# Altium PCB PCB1.PcbDoc
Units mm, origin at the board's own origin, x right, y up, seen from the top; angles counter-clockwise.
Board outline 45 x 45 mm, 2 copper layers (Top Layer, Bottom Layer); 38 components, 25 nets, 183 pads, 52 vias.
Unrouted connection lines stored in the file: 40.
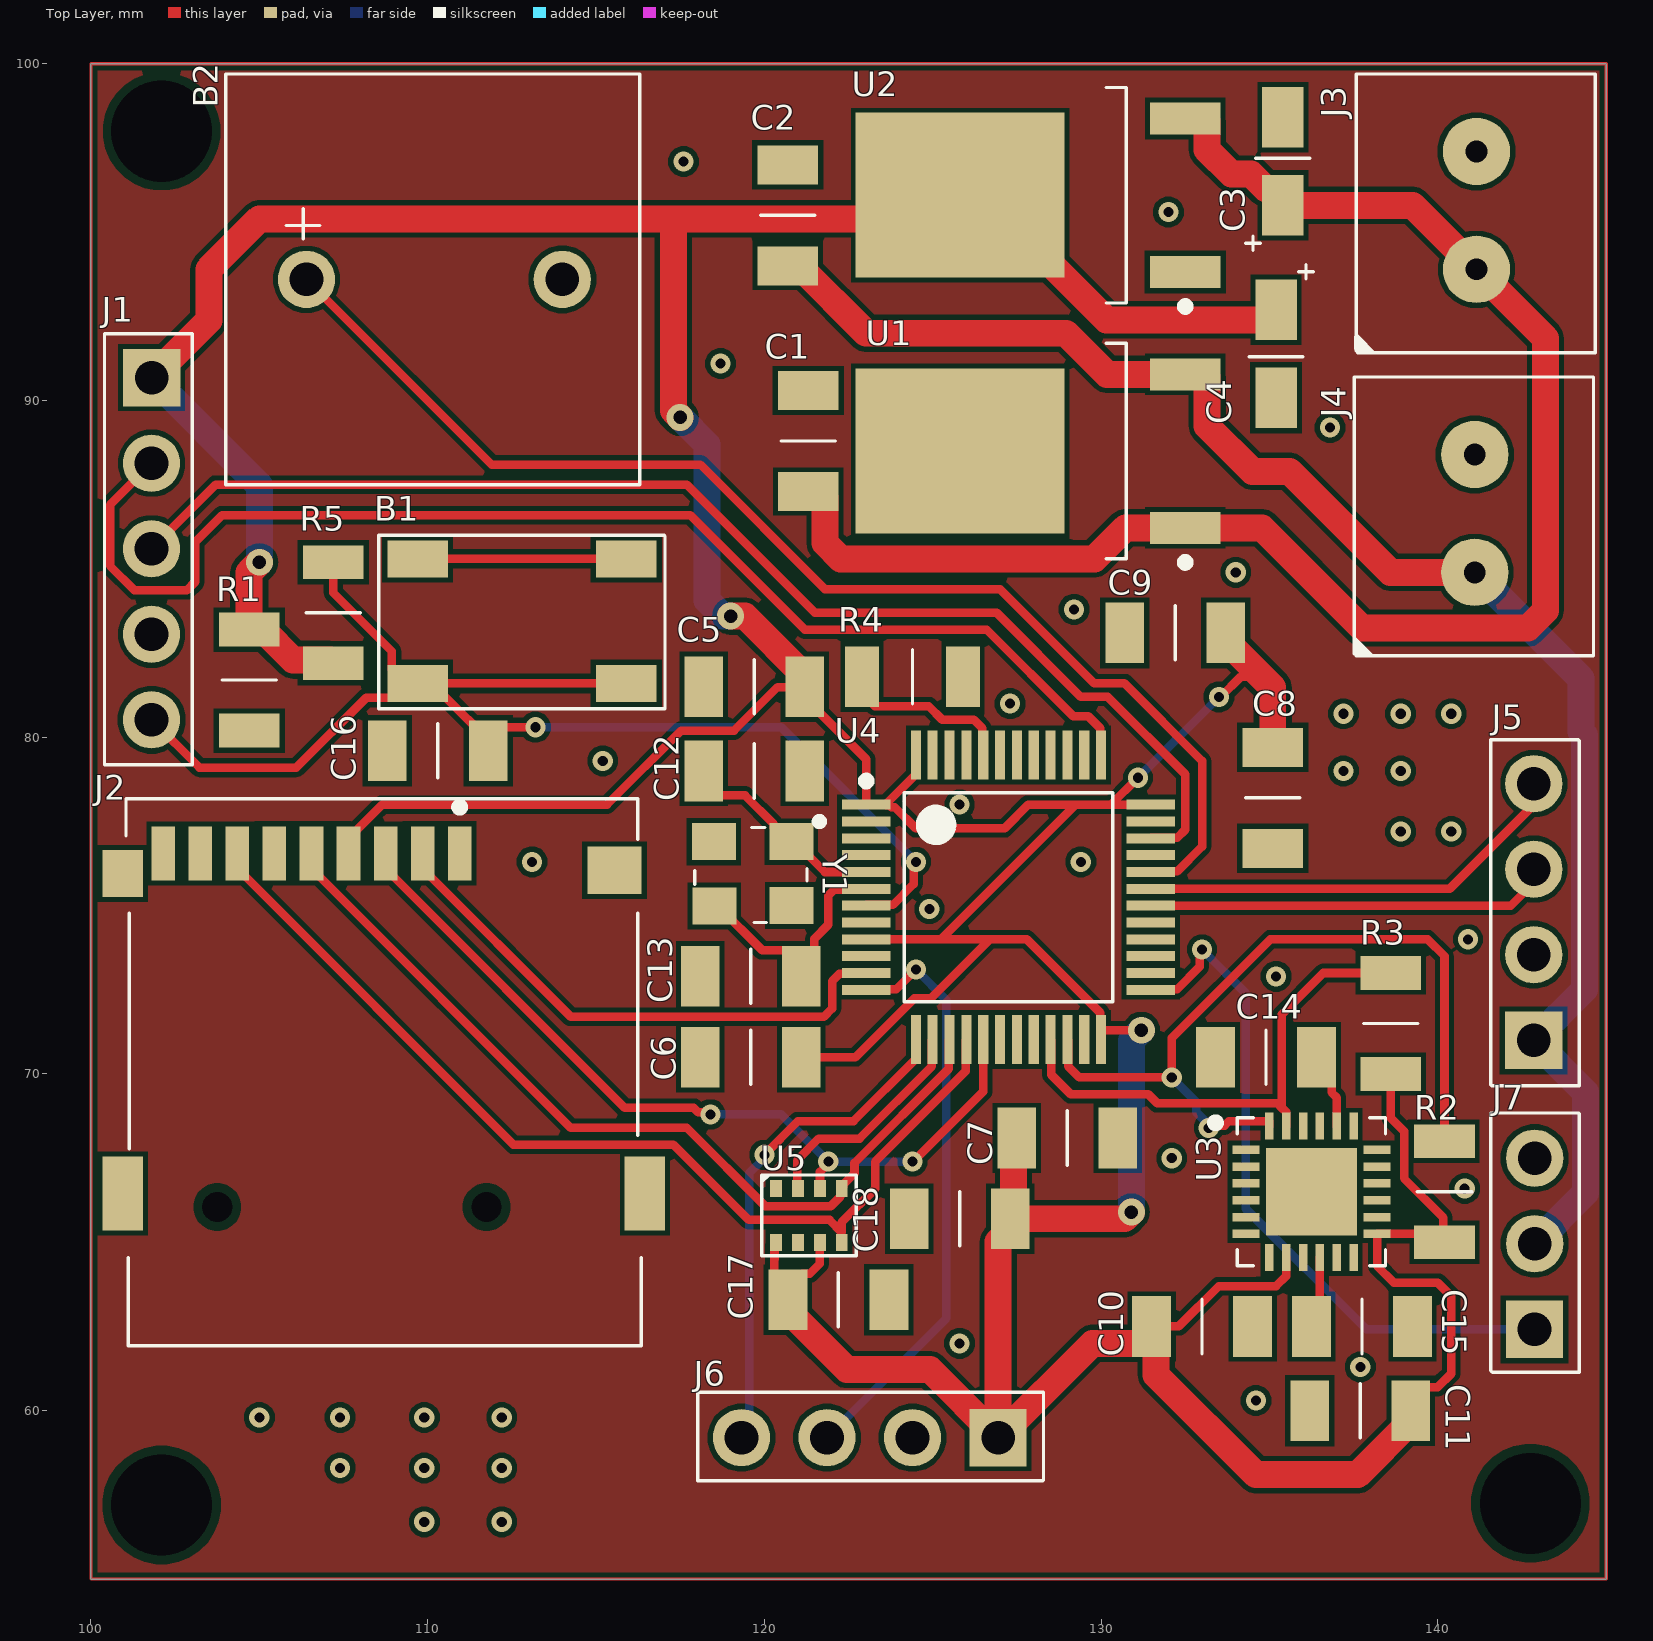
[diagram p0: Top Layer view]
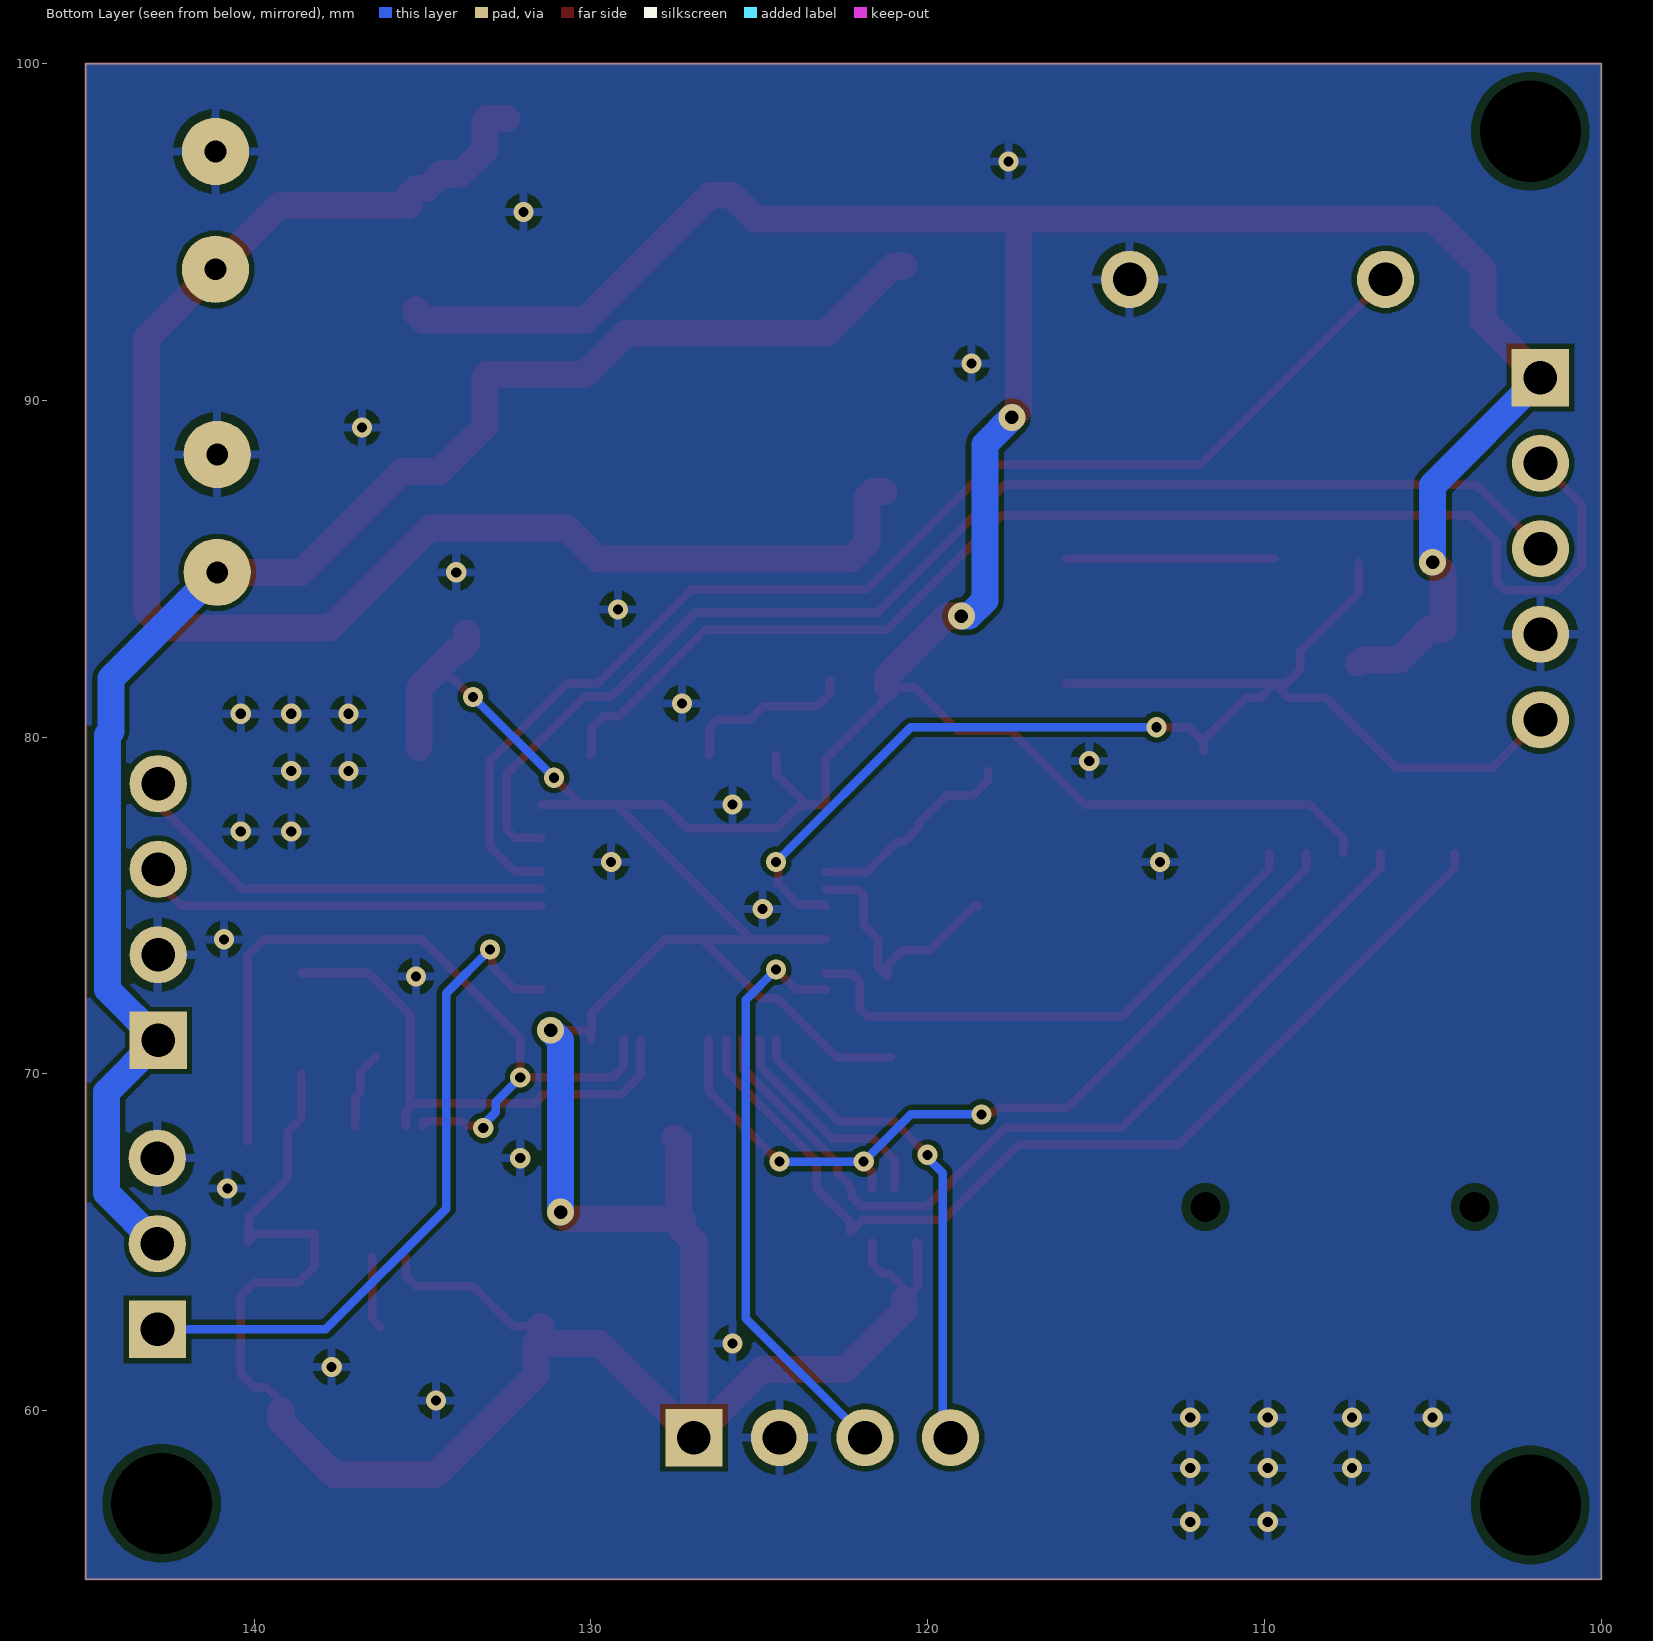
[diagram p1: Bottom Layer view, seen from below]
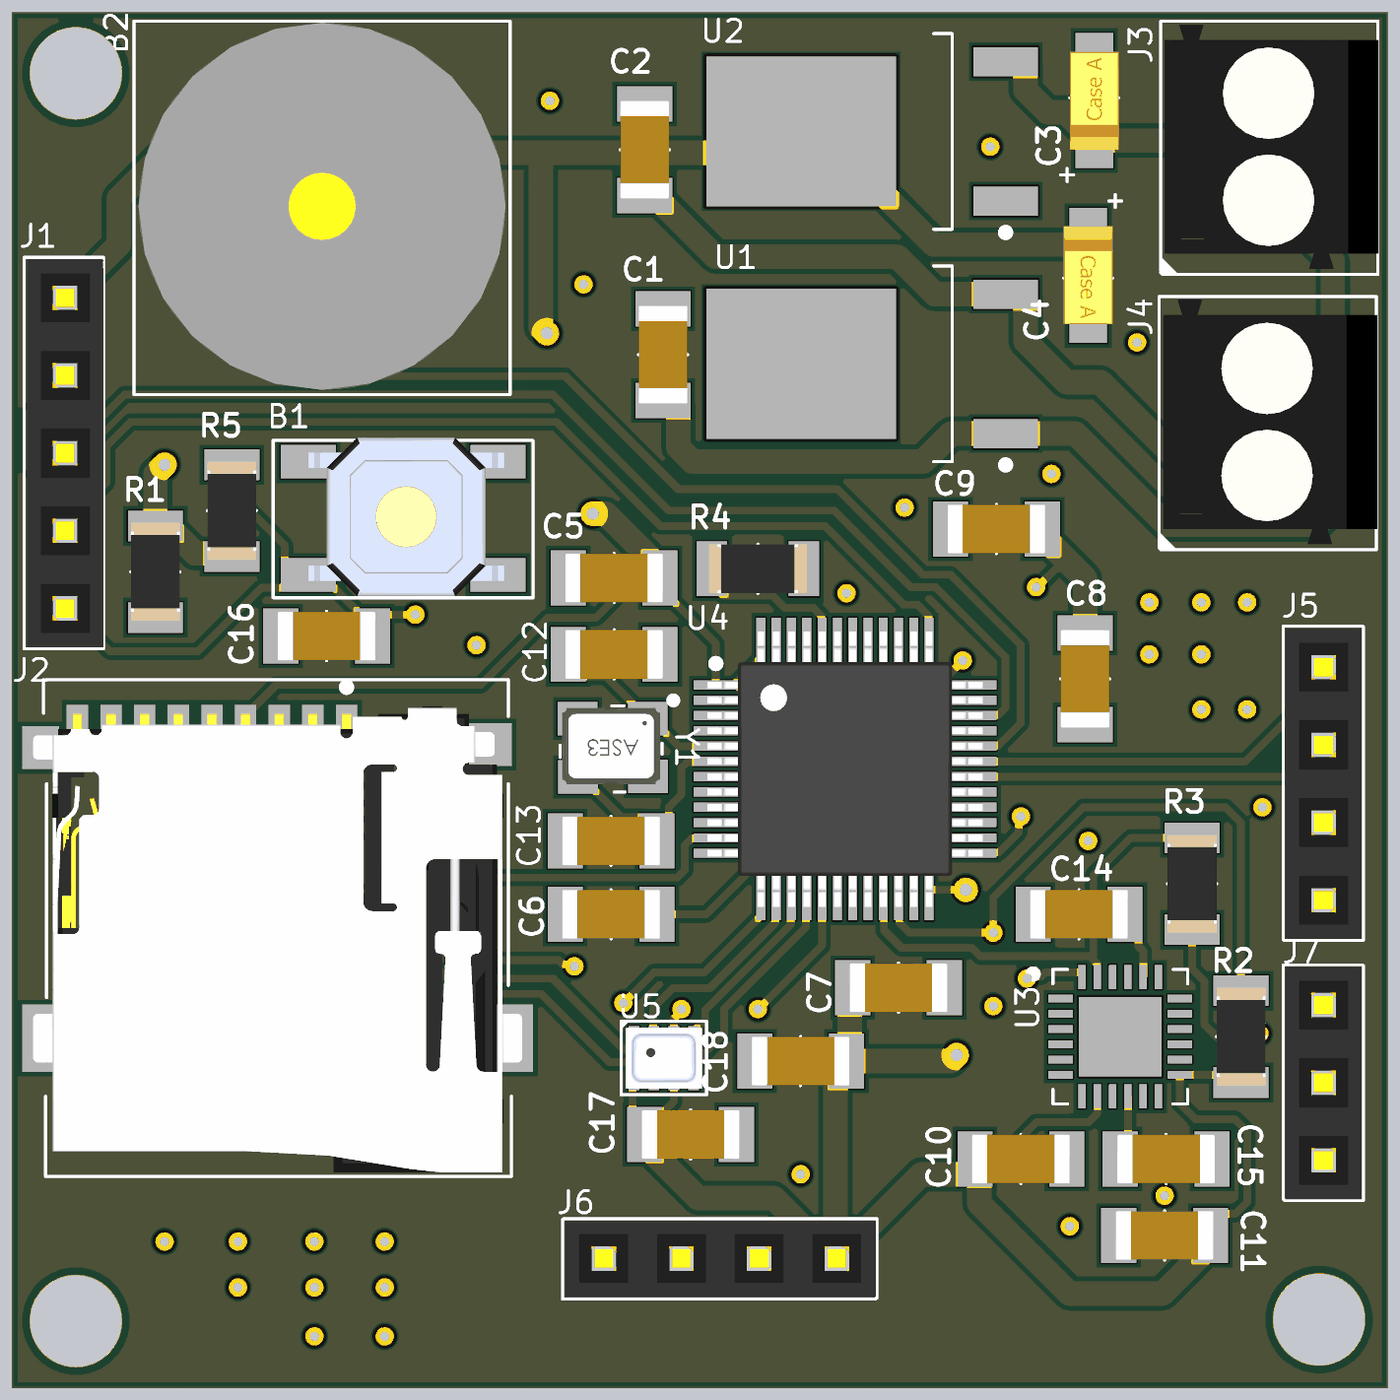
[diagram p2: 3D render of the assembled board from above, using the file's embedded part models]

## Layer stack, top to bottom
Top Solder: solder mask 0.0102, Solder Resist, Dk 3.5
Top Layer: signal copper 0.0356
Dielectric 1: dielectric 0.32, FR-4, Dk 4.8
Bottom Layer: signal copper 0.0356
Bottom Solder: solder mask 0.0102, Solder Resist, Dk 3.5

## Board outline
100,55 100,100 145,100 145,55

## Design rules (kind name [scope] priority, off if disabled: settings)
Clearance [All] p1: gap=0.254 ignorepadtopadclearanceinfootprint=FALSE except(0.152: Arc-Track Arc-SMDPad Arc-Poly Track-Track Track-SMDPad Track-Poly SMDPad-SMDPad SMDPad-THPad SMDPad-Poly THPad-Poly Via-Poly Fill-Poly Poly-Poly)
PolygonConnect [All] p1: connectstyle=Relief reliefconductorwidth=0.254 reliefentries=4 polygonreliefangle="90 Angle" airgapwidth=0.254
RoutingVias [All] p1: holewidth=0.3 width=0.6 viastyle="Through Hole" minholewidth=0.3 minwidth=0.6 maxholewidth=0.711 maxwidth=1.27
SolderMaskExpansion [All] p1: expansion=0.102 istentingtop=FALSE
Width [All] p1: maxlimit=1 minlimit=0.254 preferedwidth=0.254 minimp=50.000000 maximp=50.000000 favimp=50.000000
30 further rules are at their usual default settings.

## Components (designator, comment, footprint, x,y, rotation, side; value= is the part's Value field where it differs from the comment)
B1 "Push Button" "Push Button" 112.9,83.5 r180 top
B2 "BUZZER 5V" "BUZZER 5V" 110.2,93.6 r0 top
C1 "330 nF C1206" C1206 121.3,88.8 r90 top
C2 "0.1 uF C1206" C1206 120.7,95.5 r90 top
C3 "10 uF C1206-TANTAL" C1206-TANTAL 135.4,97.2 r90 top
C4 "10 uF C1206-TANTAL" C1206-TANTAL 135.2,91.3 r270 top
C5 "0.1 uF C1206" C1206 119.7,81.5 r180 top
C6 "0.1 uF C1206" C1206 119.6,70.5 r180 top
C7 "0.1 uF C1206" C1206 129,68.1 r0 top
C8 "0.1 uF C1206" C1206 135.1,78.2 r270 top
C9 "0.1 uF C1206" C1206 132.2,83.1 r180 top
C10 "0.1 uF C1206" C1206 133,62.5 r180 top
C11 "0.1 uF C1206" C1206 137.7,60 r0 top
C12 "16 pF C1206" C1206 119.7,79 r0 top
C13 "16 pF C1206" C1206 119.6,72.9 r180 top
C14 "2.2 nF C1206" C1206 134.9,70.5 r180 top
C15 "0.1 uF C1206" C1206 137.75,62.5 r0 top
C16 "0.1 uF C1206" C1206 110.3,79.6 r0 top
C17 "0.1 uF C1206" C1206 122.2,63.3 r180 top
C18 "0.1 uF C1206" C1206 125.8,65.7 r0 top
J1 "HEADER 2.54mm 1X5" "HEADER 2.54mm 1X5" 101.804,90.682 r270 top
J2 "MICROSD_CARD_HOLDER" MICROSD_CARD_HOLDER 108.7,71.3 r0 top
J3 "KLEMENS 1x2 3.5mm" "Klemens 1x2 3.5mm" 141.1,95.5 r90 top
J4 "KLEMENS 1x2 3.5mm" "Klemens 1x2 3.5mm" 141.05,86.5 r90 top
J5 "HEADER 2.54mm 1X4" "HEADER 2.54mm 1X4" 142.85,71 r90 top
J6 "HEADER 2.54mm 1X4" "HEADER 2.54mm 1X4" 126.942,59.196 r180 top
J7 "HEADER 2.54mm 1X3" "HEADER 2.54mm 1X3" 142.875,62.418 r90 top
R1 "10K R1206" "R1206 RESISTOR" 104.7,81.7 r90 top
R2 "4.7K R1206" "R1206 RESISTOR" 140.2,66.5 r270 top
R3 "4.7K R1206" "R1206 RESISTOR" 138.6,71.5 r270 top
R4 "10K R1206" "R1206 RESISTOR" 124.4,81.8 r0 top
R5 "10K R1206" "R1206 RESISTOR" 107.2,83.7 r90 top
U1 "L7805-DPAK" DPAK228P972X230-3N 128.1,88.5 r180 top
U2 "LD108633-DPAK" DPAK228P972X230-3N 128.1,96.1 r180 top
U3 "MPU6050" QFN50P400X400X95_HS-25N 136.25,66.5 r0 top
U4 "SMT32F101" LQFP48-STM 127.25,75.25 r0 top
U5 "BMP280" BMP280 121.325,65.8 r0 top
Y1 "8MHz 12.5 pF Osc" "8 MHz Osc" 119.6,75.8 r180 top

## Footprints (in the part's own frame and the unit in brackets; to place one, negate y for a bottom-side part, rotate by r counter-clockwise, add the part's x,y. Pads: shape width x height; smd on the part's side, far side on the other; paste and mask are expansions set on the pad)
"8 MHz Osc" [mm]
  rect 1.3x1.1 smd mask+0.05: 1(-1.203,-1.099) 2(1.097,-1.099) 3(1.082,0.808) 4(-1.207,0.792)
  silkscreen extent -2.13,-1.8 1.66,1.3, body extent -1.6,-1.45 1.6,1.05, height 1.43
BMP280 [mm]
  rect 0.35x0.5 smd mask+0.05: 1(-0.975,0.8) 2(-0.325,0.8) 3(0.325,0.8) 4(0.975,0.8) 5(0.975,-0.8) 6(0.325,-0.8) 7(-0.325,-0.8) 8(-0.975,-0.8)
  silkscreen extent -1.4,-1.2 1.4,1.2, body extent -1.25,-1 1.25,1, height 1
"BUZZER 5V" [mm]
  round 1.7 hole 1: 1(-3.8,0) 2(3.8,0)
  silkscreen extent -6.2,-6.1 6.1,6.1, body extent -6.05,-5.95 5.95,6.05, height 9.5
C1206 [mm]
  rect 1.15x1.8 smd mask+0.05: 1(-1.5,0) 2(1.5,0)
  silkscreen extent 0,-0.8 0,0.81, body extent -1.6,-0.8 1.6,0.8, height 1.05
C1206-TANTAL [mm]
  rect 1.8x1.23 smd mask+0.05: 1(-1.4,0) 1(-1.4,0) 2(1.22,0)
  silkscreen extent -2.74,-0.8 0,1.1, body extent -1.7,-0.8 1.5,0.8, height 1.62
DPAK228P972X230-3N [mm] "D-PAK, 3-Pads, Body 6.30x6.56mm (max), IPC Medium Density"
  rect 2.1x0.95 smd mask+0.07: 1(-4.4,2.28) 2(-4.4,-2.28)
  rect 6.2x4.9 smd: 3(2.286,0)
  silkscreen extent -4.52,-3.2 -2.05,3.43, body extent -2.65,-3.2 3.75,3.2, height 2.3
"HEADER 2.54mm 1X3" [mm]
  rect 1.7x1.7 hole 1: 1(0,0)
  round 1.7 hole 1: 2(2.542,-0.004) 3(5.082,-0.004)
  silkscreen extent -1.28,-1.33 6.43,1.3, body extent -1.23,-1.28 6.39,1.23, height 9.1
"HEADER 2.54mm 1X4" [mm]
  rect 1.7x1.7 hole 1: 1(0,0)
  round 1.7 hole 1: 2(2.542,-0.004) 3(5.082,-0.004) 4(7.622,-0.004)
  silkscreen extent -1.35,-1.35 8.93,1.27, body extent -1.31,-1.3 8.85,1.2, height 9.1
"HEADER 2.54mm 1X5" [mm]
  rect 1.7x1.7 hole 1: 1(0,0)
  round 1.7 hole 1: 2(2.542,-0.004) 3(5.082,-0.004) 4(7.622,-0.004) 5(10.162,-0.004)
  silkscreen extent -1.3,-1.4 11.5,1.2, body extent -1.25,-1.3 11.45,1.2, height 9.1
"Klemens 1x2 3.5mm" [mm]
  round 2 hole 0.65: 1(-1.6,-0.05) 2(1.9,-0.05)
  silkscreen extent -4.11,-3.58 4.2,3.58, body extent -3.9,-3.6 4.1,3.4, height 8.9
LQFP48-STM [mm] "TSQFP, 48-Leads, Body 7.00x7.00mm, Pitch 0.50mm, IPC Medium Density"
  rect 1.45x0.3 smd mask+0.05: 1(-4.225,2.75) 2(-4.225,2.25) 3(-4.225,1.75) 4(-4.225,1.25) 5(-4.225,0.75) 6(-4.225,0.25) 7(-4.225,-0.25) 8(-4.225,-0.75) 9(-4.225,-1.25) 10(-4.225,-1.75) 11(-4.225,-2.25) 12(-4.225,-2.75) 25(4.225,-2.75) 26(4.225,-2.25) 27(4.225,-1.75) 28(4.225,-1.25) 29(4.225,-0.75) 30(4.225,-0.25) 31(4.225,0.25) 32(4.225,0.75) 33(4.225,1.25) 34(4.225,1.75) 35(4.225,2.25) 36(4.225,2.75)
  rect 0.3x1.45 smd mask+0.05: 13(-2.75,-4.225) 14(-2.25,-4.225) 15(-1.75,-4.225) 16(-1.25,-4.225) 17(-0.75,-4.225) 18(-0.25,-4.225) 19(0.25,-4.225) 20(0.75,-4.225) 21(1.25,-4.225) 22(1.75,-4.225) 23(2.25,-4.225) 24(2.75,-4.225) 37(2.75,4.225) 38(2.25,4.225) 39(1.75,4.225) 40(1.25,4.225) 41(0.75,4.225) 42(0.25,4.225) 43(-0.25,4.225) 44(-0.75,4.225) 45(-1.25,4.225) 46(-1.75,4.225) 47(-2.25,4.225) 48(-2.75,4.225)
  silkscreen extent -4.35,-3.1 3.1,3.57, body extent -4.5,-4.5 4.5,4.5, height 1.6
MICROSD_CARD_HOLDER [mm]
  rect 0.7x1.6 smd paste+0 mask+0: 1(2.25,5.25) 2(1.15,5.25) 3(0.05,5.25) 4(-1.05,5.25) 5(-2.15,5.25) 6(-3.25,5.25) 7(-4.35,5.25) 8(-5.45,5.25) Cd(-6.55,5.25)
  rect 1.2x1.4 smd paste+0 mask+0: 10(-7.75,4.65)
  rect 1.6x1.4 smd paste+0 mask+0: 11(6.85,4.75)
  rect 1.2x2.2 smd paste+0 mask+0: 12(-7.75,-4.85) 13(7.75,-4.85)
  round 0 hole 0.9 unplated paste-1000 mask+0: ""(-4.95,-5.25) ""(3.05,-5.25)
  silkscreen extent -7.66,-9.37 7.64,6.87, body extent -8,-9.25 8,6, height 1.85
"Push Button" [mm]
  rect 1.8x1.1 smd mask+0.05: 1(-3,1.9) 2(3.2,1.9) 3(-3,-1.8) 4(3.2,-1.8)
  silkscreen extent -4.15,-2.5 4.35,2.65, body extent -3.2,-2.6 3.2,2.6, height 1.5
QFN50P400X400X95_HS-25N [mm] "QFN, 24-Leads, Body 4.00x4.00mm, Pitch 0.50mm, Thermal Pad 2.70x2.60mm, IPC Medium Density"
  rect 0.8x0.25 smd mask+0.05: 1(-1.95,1.25) 2(-1.95,0.75) 3(-1.95,0.25) 4(-1.95,-0.25) 5(-1.95,-0.75) 6(-1.95,-1.25) 13(1.95,-1.25) 14(1.95,-0.75) 15(1.95,-0.25) 16(1.95,0.25) 17(1.95,0.75) 18(1.95,1.25)
  rect 0.25x0.8 smd mask+0.05: 7(-1.25,-1.95) 8(-0.75,-1.95) 9(-0.25,-1.95) 10(0.25,-1.95) 11(0.75,-1.95) 12(1.25,-1.95) 19(1.25,1.95) 20(0.75,1.95) 21(0.25,1.95) 22(-0.25,1.95) 23(-0.75,1.95) 24(-1.25,1.95)
  rect 2.7x2.6 smd mask+0.075: 25(0,0)
  silkscreen extent -2.97,-2.2 2.2,2.2, body extent -2.05,-2.05 2.05,2.05, height 0.95
"R1206 RESISTOR" [mm]
  rect 1x1.8 smd mask+0.05: 1(-1.5,0) 2(1.5,0)
  silkscreen extent 0,-0.8 0,0.81, body extent -1.6,-0.8 1.6,0.81, height 0.55

## Part data
B1: "Button for Reset"
J2: "MicroSD Card Holder"
J3 J4: "1x2 3.5mm Klemens"
U1: "L7805 5V REGULATOR"
U2: "3.3V REGULATOR"
U3: "MPU6050 GYRO"
U4: "48 PINLI MICROISLECI"
U5: "BMP280 SENSOR"

## Free pads (board coordinates)
  round 1.524 hole 3: 6(102.1,57.2) 6(102.1,98) 6(142.75,57.25)

## Via types
v1: diameter 0.6, hole 0.3, Top Layer to Bottom Layer, 47 vias
v2: diameter 0.8, hole 0.4, Top Layer to Bottom Layer, 5 vias

## Nets (pads, with @x,y where several pads share a name; then routed paths per layer and width w, separated by ;. In a path a pad name is that pad's centre, name@x,y a point inside that pad or via, vN(x,y) a via of type N, cw(c..) or ccw(c..) an arc to the next point about the centre after c; other vN are vias at no path point)
3.3V: C4.1 C5.1 C6.1 C7.1 C8.1 C9.1 C10.2 C11.2 C17.2 C18.2 J1.1 J2.4 J6.1 R1.2 R2.2 R3.2 R5.1 U2.3 U3.8 U3.13 U4.1 U4.9 U4.24 U4.36 U4.48 U5.6 U5.8 | length 197.8
  Top Layer w0.254: J2.4 107.65,77 108.65,78 115.33,78 117.53,80.2 119.1,80.2 120.393,81.493 121.193,81.493 C5.1 121.2,81.175 123.025,79.35 U4.1 U4.1@123.6,78 ; U5.8 120.302,64.952 120.302,64.502 120.3,64.5 120.3,63.7 C17.2 120.7,63.625 121.148,64.073 121.354,64.073 121.65,64.369 U5.6 ; C6.1 122.705,70.5 124.455,72.25 124.95,72.25 126.7,74 ; U4.9 125.25,74 ; U4.48 124.5,78.9 U4.1@123.6,78 ; U4.24@129.977,71.3 129.977,71.818 127.795,74 126.7,74 ; U4.24 130,71.277 130.023,71.3 v2(131.2,71.3) ; v1(131.1,78.8) 130.3,78 ; U4.36 130.3,78 ; C10.2 131.507,62.507 132.307,62.507 133.5,63.7 135.2,63.7 135.498,63.998 U3.8 U3.8 ; v1(133.5,81.2) 133.547,81.2 134.147,81.8 134.775,81.8 ; R3.2 138.6,68.7 139,68.3 139,66.9 140.168,65.732 R2.2@140.168,65.032 ; C11.2 139.2,60.255 139.648,60.703 140.003,60.703 140.4,61.1 140.4,63.4 140,63.8 138.7,63.8 138.2,64.3 U3.13 139.95,65.25 R2.2@140.168,65.032 ; R2.2 R2.2@140.168,65.032 ; U4.1@123.6,78 123.623,77.977 123.724,77.977 123.772,77.929 123.866,77.929 124.495,77.3 127.138,77.3 127.837,78 129.25,78 ; 125.25,74 126.7,74 ; 125.25,74 129.25,78 ; 129.25,78 130.3,78
  Top Layer w0.8: J1.1 103.5,92.378 103.5,93.9 105,95.4 117.3,95.4 ; v2(105,85.2) 104.7,84.9 R1.2 105.1,83.2 106,82.3 107.1,82.3 R5.1 ; v2(117.5,89.5) 117.3,89.7 117.3,95.4 ; v2(119,83.6) 119.425,83.6 121.2,81.825 C5.1 ; C17.2 120.7,62.975 122.452,61.223 124.915,61.223 J6.1 ; C7.1 127.4,68 127.4,65.8 C18.2 ; v2(130.9,65.9) 130.7,65.7 C18.2 ; C10.2 C10.2@131.5,62.175 ; C9.1 133.7,82.775 133.875,82.6 133.975,82.6 134.775,81.8 135.1,81.475 C8.1 ; C4.1@135.2,92.7 135.2,92.615 134.985,92.4 130.164,92.4 126.464,96.1 U2.3 125.114,95.4 117.3,95.4 ; C11.2 139.2,59.675 137.625,58.1 134.6,58.1 131.636,61.064 131.636,62 131.5,62 C10.2@131.5,62.175 ; J6.1 126.942,65.017 127.3,65.375 C18.2 ; J6.1 129.746,62 131.325,62 C10.2@131.5,62.175
  Bottom Layer w0.254: v1(131.1,78.8) v1(133.5,81.2)
  Bottom Layer w0.8: J1.1 105,87.486 v2(105,85.2) ; v2(117.5,89.5) 118.3,88.7 118.3,84.069 118.769,83.6 v2(119,83.6) ; v2(130.9,65.9) 130.9,71 v2(131.2,71.3)
5V: C2.1 J4.1 J5.1 J7.2 U1.2 | length 48.2
  Top Layer w0.8: C2.1 121.025,94 123.025,92 128.96,92 130.18,90.78 133.075,90.78 133.15,90.705 133.15,89.25 134.5,87.9 135.6,87.9 138.6,84.9 J4.1
  Bottom Layer w0.8: J4.1 144.26,81.74 144.26,80.17 144.358,80.072 144.358,72.508 J5.1 144.383,69.467 144.383,66.464 J7.2
7.4V: C1.1 C3.1 J3.1 U1.1 U2.2 | length 47.5
  Top Layer w0.8: C1.1 121.625,87.3 121.8,87.125 121.8,85.769 122.269,85.3 129.8,85.3 130.72,86.22 134.78,86.22 137.754,83.246 142.677,83.246 143.2,83.769 143.2,91.85 J3.1 139.25,95.8 135.4,95.8 135.4,96.085 135.185,96.3 134.88,96.3 134.452,96.728 133.872,96.728 133.15,97.45 133.15,98.305 133.075,98.38 U2.2
GND: B1.3 B1.4 B2.2 C1.2 C2.2 C3.2 C4.2 C5.2 C6.2 C7.2 C8.2 C9.2 C10.1 C11.1 C12.2 C13.2 C14.2 C15.2 C16.1 C17.1 C18.1 J1.4 J2.6 J2.10 J2.11 J2.12 J2.13 J3.2 J4.2 J5.2 J6.2 J7.3 R1.1 R4.2 U1.3 U2.1 U3.1 U3.9 U3.11 U3.18 U4.8 U4.23 U4.35 U4.47 U5.1 U5.7 Y1.2 Y1.4 | length 6.2
  Top Layer w0.254: B1.4 B1.3
  other v1: 109.9,56.7 112.2,56.7 107.4,58.3 109.9,58.3 112.2,58.3 105,59.8 107.4,59.8 109.9,59.8 112.2,59.8 134.6,60.3 137.7,61.3 125.8,62 140.8,66.6 132.1,67.5 135.2,72.9 140.9,74 124.9,74.9 113.1,76.3 129.4,76.3 138.9,77.2 140.4,77.2 125.8,78 137.2,79 138.9,79 115.2,79.3 137.2,80.7 138.9,80.7 140.4,80.7 127.3,81 129.2,83.8 134,84.9 136.8,89.2 118.7,91.1 132,95.6 117.6,97.1
NetB2_1: B2.1 U4.32 | length 36.9
  Top Layer w0.254: B2.1 111.9,88.1 118.1,88.1 121.8,84.4 127,84.4 129.794,81.606 130.694,81.606 133,79.3 133,76.755 132.268,76.023 131.498,76.023 U4.32
NetC12_1: C12.1 U4.5 Y1.1 | length 6.3
  Top Layer w0.254: C12.1 118.2,78.723 118.648,78.275 119.426,78.275 120.28,77.422 120.28,77.322 120.703,76.899 120.903,76.899 121.801,76 U4.5
NetC13_1: C13.1 U4.6 Y1.3 | length 7.6
  Top Layer w0.254: Y1.3 118.618,74.992 119.937,73.673 120.752,73.673 121.2,73.225 121.2,72.9 121.486,73.186 121.486,74.019 121.9,74.433 121.9,75.3 122.077,75.477 123.002,75.477 U4.6
NetC14_1: C14.1 U3.20 | length 2.3
  Top Layer w0.254: C14.1 136.848,70.052 136.848,69.452 137,69.3 U3.20
NetC15_1: C15.1 U3.10 | length 2.2
  Top Layer w0.254: C15.1 136.5,62.75 U3.10
NetJ1_2: J1.2 U4.37 | length 38.3
  Top Layer w0.254: J1.2 100.569,86.909 100.569,85.09 101.29,84.369 102.851,84.369 103.1,84.618 103.1,85.8 103.9,86.6 117.8,86.6 121.2,83.2 126.6,83.2 129.174,80.626 129.619,80.626 129.977,80.268 129.977,79.498 U4.37
NetJ1_3: J1.3 U4.34 | length 37.8
  Top Layer w0.254: J1.3 103.7,87.5 117.7,87.5 121.5,83.7 126.9,83.7 129.4,81.2 130.2,81.2 132.5,78.9 132.5,77.255 132.268,77.023 131.498,77.023 U4.34
NetJ2_2: J2.2 U4.11 | length 16.5
  Top Layer w0.254: J2.2 109.85,76.1 114.25,71.7 121.77,71.7 122.012,71.942 122.012,72.756 122.232,72.977 123.002,72.977 U4.11
NetJ2_3: J2.3 U4.17 U5.3 | length 25.2
  Top Layer w0.254: J2.3 108.75,76.1 115.85,69 117.9,69 118.034,68.866 118.334,68.866 v1(118.4,68.8) ; U5.3 121.653,66.603 121.653,67.091 121.9,67.338 v1(121.9,67.4) ; v1(124.4,67.4) 124.42,67.4 126.5,69.48 U4.17
  Bottom Layer w0.254: v1(118.4,68.8) 120.5,68.8 121.95,67.35 122,67.4 v1(124.4,67.4)
NetJ2_5: J2.5 U4.15 U5.4 | length 26.4
  Top Layer w0.254: J2.5 106.55,76.1 114.25,68.4 117.7,68.4 120.029,66.071 121.971,66.071 122.252,66.352 122.252,66.552 U5.4 122.348,66.648 122.348,66.723 122.677,67.052 122.677,67.358 125.477,70.158 125.477,71.002 U4.15
NetJ2_7: J2.7 U4.16 U5.5 | length 30.1
  Top Layer w0.254: J2.7 104.35,76.1 112.55,67.9 117.3,67.9 119.535,65.665 121.935,65.665 122.3,65.3 122.3,65.6 123.292,66.592 123.292,67.399 125.977,70.084 125.977,71.002 U4.16
NetJ5_3: J5.3 U4.30 | length 12.2
  Top Layer w0.254: U4.30 142.172,75 J5.3@143.254,76.082
NetJ5_4: J5.4 U4.31 | length 13.2
  Top Layer w0.254: U4.31 140.354,75.5 143.254,78.4 J5.4@143.254,78.622
NetJ6_3: J6.3 U4.12 | length 17.5
  Top Layer w0.254: U4.12 123.048,72.523 123.923,72.523 v1(124.5,73.1)
  Bottom Layer w0.254: J6.3 125.4,62.74 125.4,72.2 v1(124.5,73.1)
NetJ6_4: J6.4 U4.13 | length 14.9
  Top Layer w0.254: v1(120,67.6) 121,68.6 122.65,68.6 124.5,70.45 U4.13
  Bottom Layer w0.254: J6.4 119.551,59.431 119.551,67.057 120,67.506 v1(120,67.6)
NetJ7_1: J7.1 U4.25 | length 21
  Top Layer w0.254: U4.25 131.498,72.523 132.268,72.523 132.934,73.189 132.934,73.634 v1(133,73.7)
  Bottom Layer w0.254: v1(133,73.7) 134.3,72.4 134.3,66 137.882,62.418 J7.1@143.246,62.418
NetR2_1: R2.1 U3.24 U4.22 | length 24.2
  Top Layer w0.254: U4.22 129.023,71.002 129.023,70.232 129.355,69.9 v1(132.1,69.9) 132.1,71.07 135.03,74 139.7,74 140.2,73.5 R2.1 ; v1(133.2,68.4) 133.266,68.466 133.666,68.466 133.8,68.6 134.998,68.6 135,68.598 U3.24
  Bottom Layer w0.254: v1(132.1,69.9) 132.829,69.171 132.829,68.865 133.2,68.494 v1(133.2,68.4)
NetR3_1: R3.1 U3.23 U4.21 | length 15.4
  Top Layer w0.254: U4.21 128.523,71.002 128.523,69.977 129.1,69.4 131.4,69.4 131.671,69.129 135.241,69.129 135.369,69 ; U3.23 135.498,68.452 135.498,68.872 135.369,69 ; R3.1 136.6,73 135.369,71.769 135.369,69
NetR4_1: R4.1 U4.44 | length 5.2
  Top Layer w0.254: R4.1@122.9,81.7 122.9,81.3 123.273,80.927 124.878,80.927 125.284,80.521 126.224,80.521 126.477,80.268 126.477,79.498 U4.44
NetU4_14: U4.14 U5.2 | length 6.8
  Top Layer w0.254: U5.2 120.975,66.625 120.975,67.427 121,67.452 121,67.47 121.611,68.081 122.826,68.081 124.977,70.232 124.977,71.002 U4.14
NRST: B1.1 B1.2 C16.2 J1.5 R5.2 U4.7 | length 40.6
  Top Layer w0.254: J1.5 103.22,79.1 106.1,79.1 108.177,81.177 109.277,81.177 B1.2 ; R5.2 107.2,84.288 108.927,82.561 108.927,82.023 109.35,81.6 B1.2 ; C16.2 C16.2@111.8,79.852 ; v1(113.2,80.3) 112.248,80.3 C16.2@111.8,79.852 ; B1.1 B1.2 ; U4.7 123.048,75.023 123.818,75.023 124.434,75.639 124.434,76.234 v1(124.5,76.3) ; B1.2 110.123,81.177 110.548,81.177 111.8,79.925 C16.2@111.8,79.852
  Bottom Layer w0.254: v1(113.2,80.3) 120.5,80.3 v1(124.5,76.3)
pads on no net: J2. J2.1 J2.8 J2.Cd U3.2 U3.3 U3.4 U3.5 U3.6 U3.7 U3.12 U3.14 U3.15 U3.16 U3.17 U3.19 U3.21 U3.22 U3.25 U4.2 U4.3 U4.4 U4.10 U4.18 U4.19 U4.20 U4.26 U4.27 U4.28 U4.29 U4.33 U4.38 U4.39 U4.40 U4.41 U4.42 U4.43 U4.45 U4.46
copper on no net: | length 180
  Top Layer w0.1: 100,55 100,100 145,100 145,55 100,55

## Polygon pours and split planes (outlines as drawn)
no net on Top Layer "NONET_L01_P000" (solid, pour order 0): 100,100 145,100 145,55 100,55
GND on Bottom Layer "GND_L02_P002" (solid, pour order 2): 100,100 145,100 145,55 100,55